# EAGLE board lv1b-imu-1 (EAGLE 3.55)
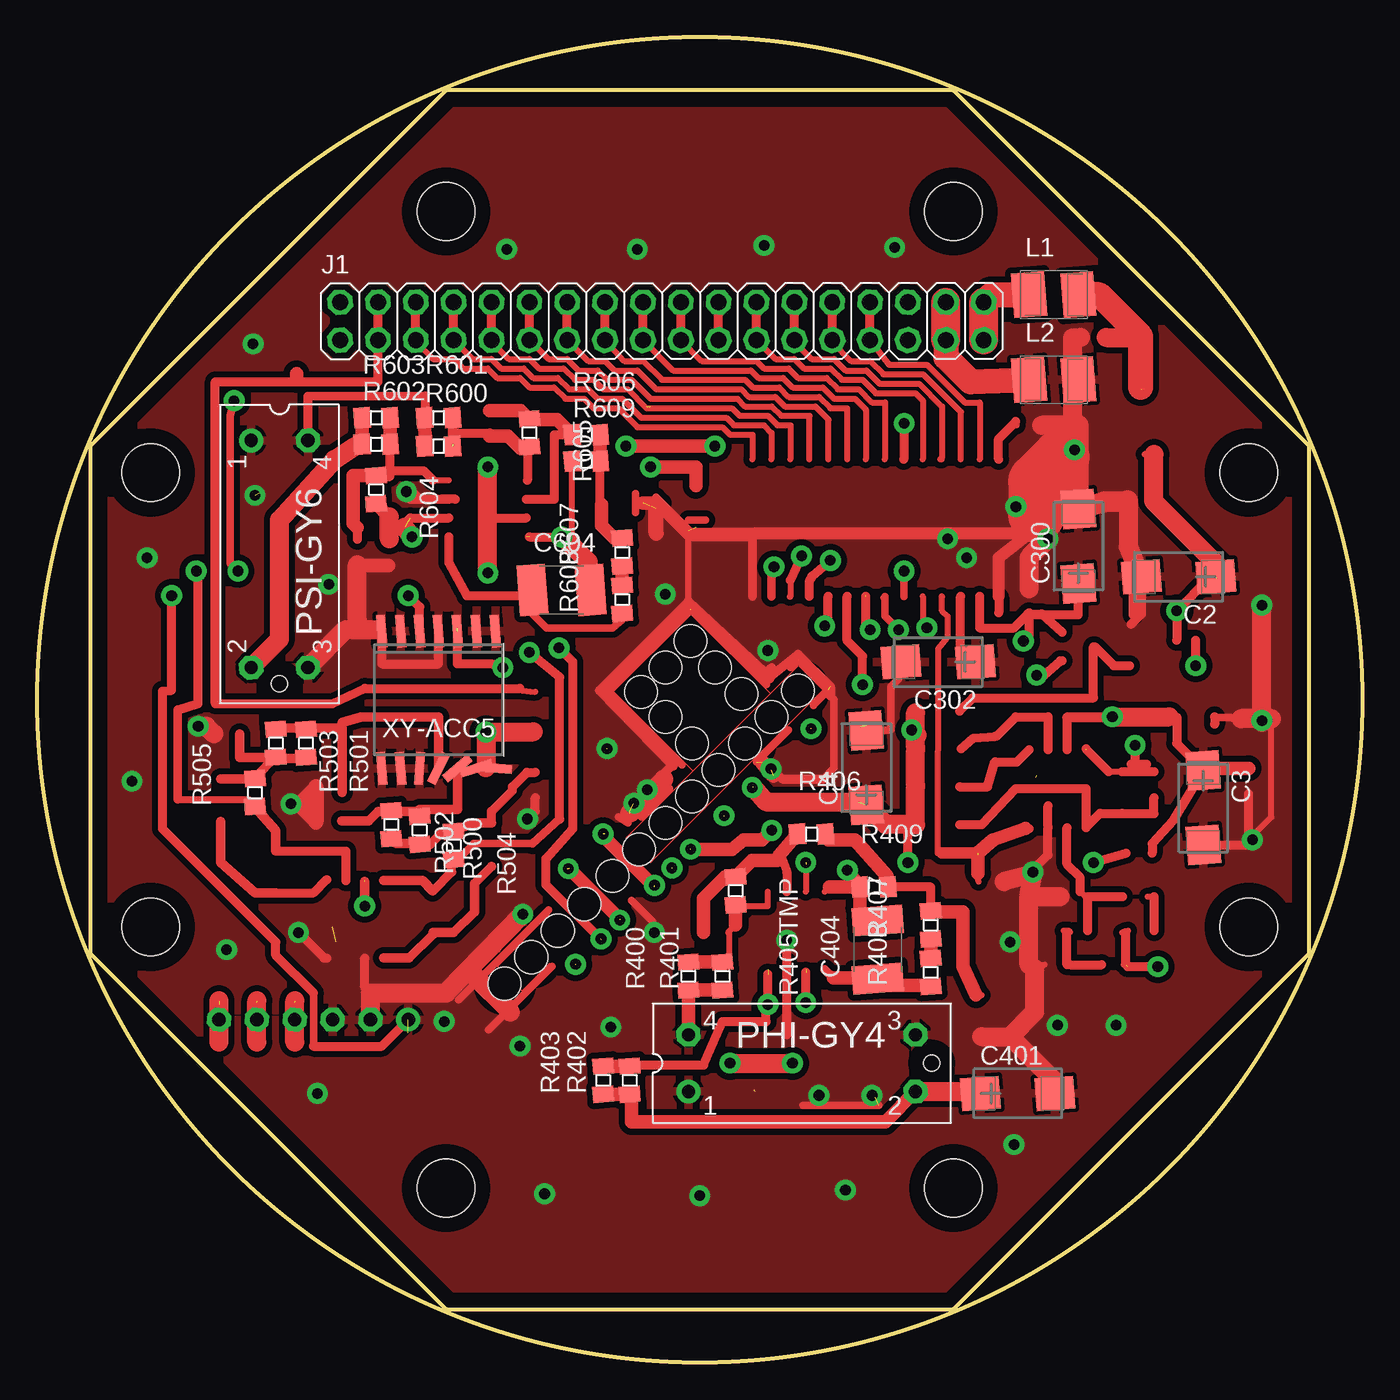
[diagram p0: board, top side]
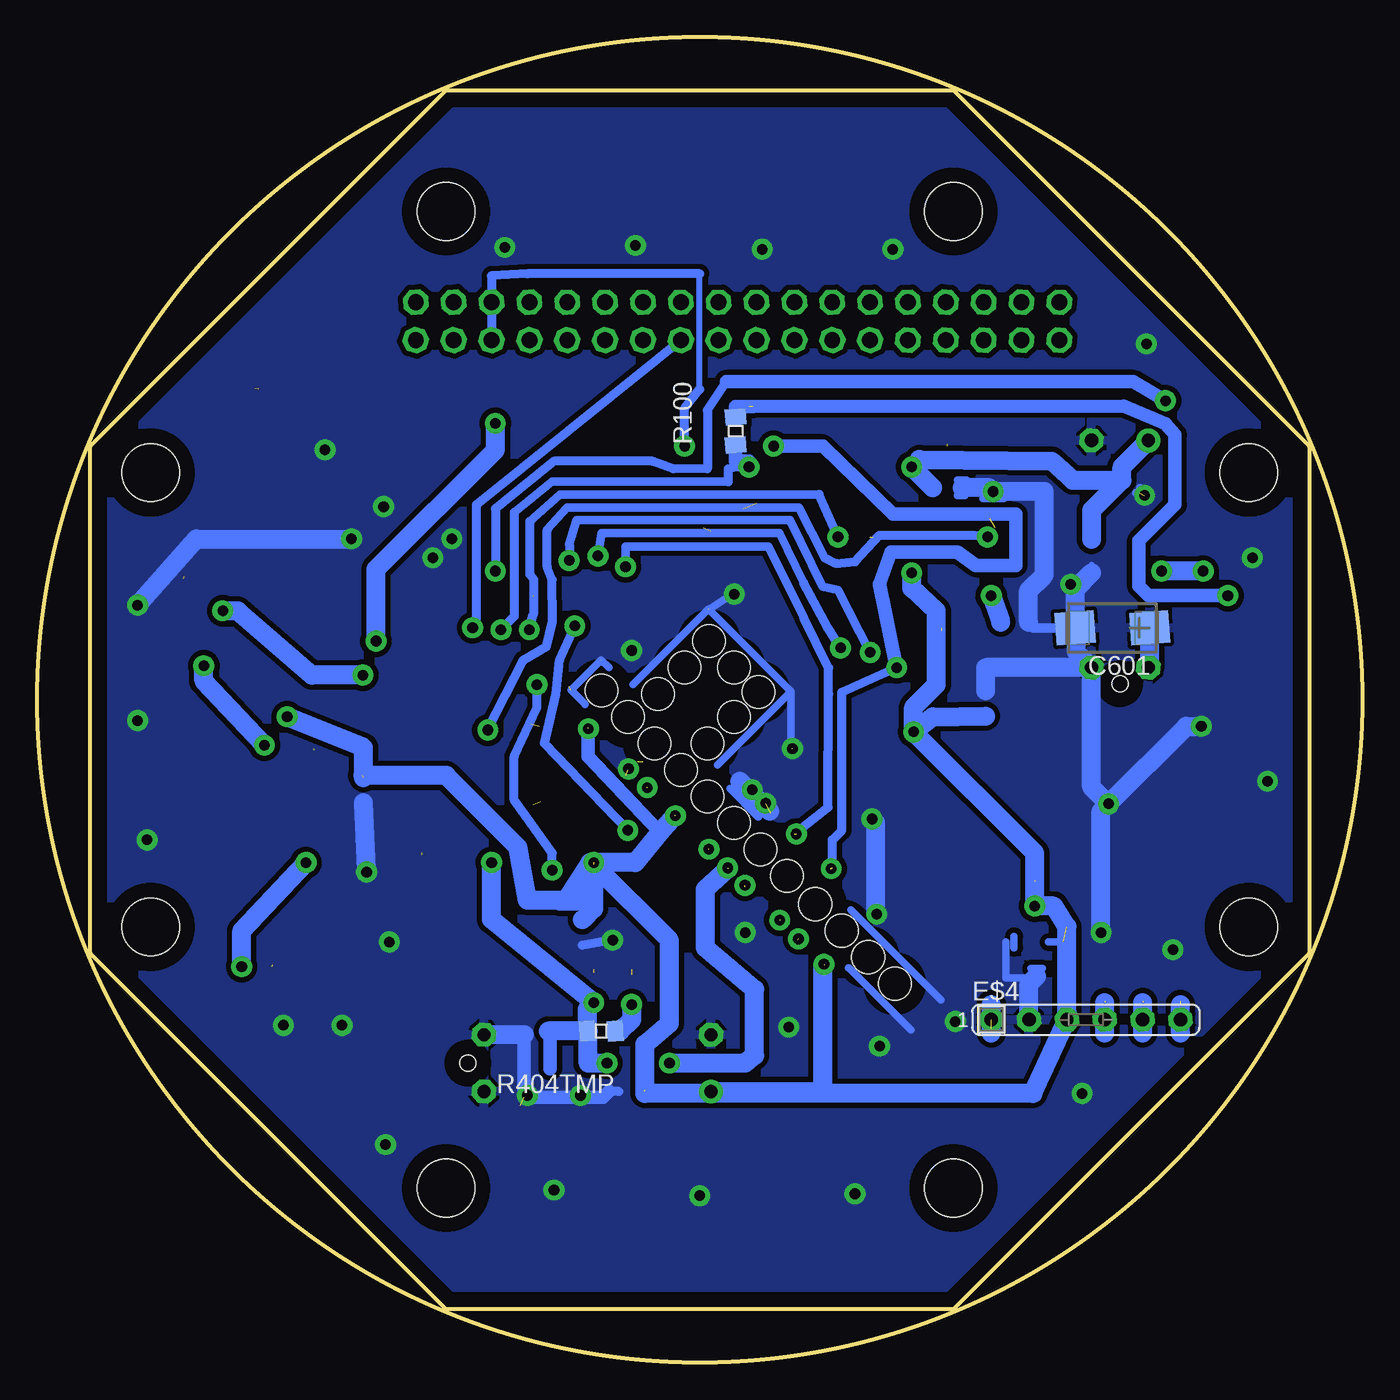
[diagram p1: board, bottom side, seen from below]

Size 88.9 x 88.9 mm. Coordinates in mm from the lower left corner, seen from the top.
Outline: 61.47,85.34 27.43,85.34 3.56,61.47 3.56,27.43 27.43,3.56 61.47,3.56 85.34,27.43 85.34,61.47 61.47,85.34
Outline: circle at 44.45,44.45 radius 44.45
Copper layers used: Top, Bottom
Holes 3.86 mm at 27.43,77.22 61.47,77.22 61.47,11.68 27.43,11.68 81.28,59.69 7.62,59.69 7.62,29.21 81.28,29.21
Holes 2.18 mm at 51.05,45.09 49.28,43.31 47.5,41.53 45.72,39.75 43.94,37.97 42.16,36.2 40.39,34.42 38.61,32.64 36.7,30.73 34.93,28.96 33.15,27.18 31.37,25.4 40.51,44.96 43.82,48.39 42.16,46.61 45.47,46.61 47.24,44.83 42.16,43.31 43.94,41.53
tKeepout: area 78.1,56.5 to 84.5,62.9; area 78.1,26 to 84.5,32.4; area 4.4,26 to 10.8,32.4; area 4.4,56.5 to 10.8,62.9; 2 lines
bRestrict: 12 lines

## Footprints (pad centres in the part's own frame; a part is rotated, then mirrored left to right if it is on the bottom)
6032 = smd 2.6 x 2.2 rotated 4.3:  -2.5,0 | smd 2.6 x 2.2 rotated 4.4:  2.5,0
812 = smd 1.9 x 3.4 rotated 4.3:  -1.95,0 | smd 1.9 x 3.4 rotated 4.4:  1.95,0
L-6 = drill 0.889 pad 1.6 round:  -6.35,0 | drill 0.889 pad 1.6 octagon:  -3.81,0;  -1.27,0;  1.27,0;  3.81,0;  6.35,0
18 = drill 1.067 pad 1.676 octagon:  -21.59,-1.27;  -21.59,1.27;  -19.05,-1.27;  -19.05,1.27;  -16.51,-1.27;  -16.51,1.27;  -13.97,-1.27;  -13.97,1.27;  -11.43,-1.27;  -11.43,1.27;  -8.89,-1.27;  -8.89,1.27;  -6.35,-1.27;  -6.35,1.27;  -3.81,-1.27;  -3.81,1.27;  -1.27,-1.27;  -1.27,1.27;  1.27,-1.27;  1.27,1.27;  3.81,-1.27;  3.81,1.27;  6.35,-1.27;  6.35,1.27;  8.89,-1.27;  8.89,1.27;  11.43,-1.27;  11.43,1.27;  13.97,-1.27;  13.97,1.27;  16.51,-1.27;  16.51,1.27;  19.05,-1.27;  19.05,1.27;  21.59,-1.27;  21.59,1.27
3FS = smd 2.2 x 3 rotated 4.3:  -1.65,0.01 | smd 2.2 x 3 rotated 4.4:  1.65,0
RO_CAN = drill 0.889 pad 1.6 round:  -8.89,-3.81 | drill 0.889 pad 1.6 octagon:  6.35,-3.81;  6.35,0;  -8.89,0 | hole 1.067: 7.429,-1.905
05 = smd 1.092 x 1.397 rotated 4.4:  0.94,0 | smd 1.092 x 1.397 rotated 4.3:  -0.94,0
14W = smd 0.6 x 2.2 rotated 4.4:  -2.54,-4.6 | smd 0.6 x 2.2 rotated 71.8:  -2.54,4.6 | smd 0.6 x 2.2 rotated 4.3:  -3.81,-4.6;  1.27,4.6 | smd 0.6 x 2.2 rotated 4.5:  -1.27,-4.6 | smd 0.6 x 2.2 rotated 4.6:  0,-4.6 | smd 0.6 x 2.2 rotated 94.3:  -3.81,4.6 | smd 0.6 x 2.2 rotated 49.3:  -1.27,4.6 | smd 0.6 x 2.2 rotated 26.8:  0,4.6 | smd 0.6 x 2.2 rotated 4.7:  2.54,-4.6;  1.27,-4.6 | smd 0.6 x 2.2 rotated 5:  2.54,4.6 | smd 0.6 x 2.2 rotated 4.8:  3.81,-4.6 | smd 0.6 x 2.2 rotated 4.9:  3.81,4.6

## Placement (x,y rotation side)
AA5  1013  [8]  21.34,29.72 0 top
AG4  1013  [8]  50.93,28.96 0 top
AG6  1013  [8]  30.23,57.28 270 top
C1  .1  [012]  74.04,57.79 0 top
C2  10  [6032]  76.58,52.71 180 top
C3  10  [6032]  78.23,37.21 270 top
C4  10  [6032]  55.63,39.88 90 top
C5  .1  [012]  67.01,38.38 270 bottom
C6  [012]  74.93,38.74 90 top
C7  22pF  [012]  64.26,41.15 90 top
C8  .1  [012]  70.87,68.76 0 top
C9  .1  [012]  81.28,38.99 90 top
C101  1  [206]  22.48,28.19 0 bottom
C102  .015  [210]  44.2,57.4 270 top
C200  .1  [012]  17.4,67.18 90 top
C300  10  [6032]  69.85,54.74 90 top
C301  .1  [012]  66.55,51.05 90 top
C302  10  [6032]  60.45,46.99 180 top
C303  .1  [012]  64.01,32.26 180 top
C304  101  [012]  66.55,62.87 0 top
C400  .1  [012]  49.02,18.16 180 bottom
C401  10  [6032]  65.79,18.03 0 top
C402  ?  [012]  55.37,19.69 180 bottom
C403  .022  [210]  63.37,23.24 90 top
C404  .056  [812]  56.39,27.69 90 top
C405  ?  [012]  45.59,28.83 0 top
C406  .1  [012]  52.32,28.83 270 bottom
C407  .1  [012]  55.37,21.97 180 bottom
C500  .1  [012]  25.27,44.2 270 bottom
C501  .1  [012]  23.24,49.66 0 bottom
C502  .001  [012]  19.56,36.32 180 top
C503  .001  [012]  19.56,38.61 180 top
C504  .0027  [012]  33.4,38.74 270 top
C505  .0027  [012]  12.7,42.16 180 top
C506  .015  [210]  26.54,30.23 90 top
C507  .015  [210]  16,32.89 90 top
C508  .1  [012]  20.83,25.91 180 bottom
C600  .1  [012]  18.16,54.36 270 bottom
C601  10  [6032]  16.76,49.28 180 bottom
C602  ?  [012]  21.46,54.36 270 top
C603  .022  [210]  39.24,57.66 180 top
C604  .056  [812]  35.18,51.82 0 top
C605  ?  [012]  30.35,62.99 270 top
C606  .1  [012]  27.69,58.67 0 bottom
C607  .1  [012]  23.62,54.36 270 top
D1  [B]  74.3,63.12 90 top
D3  [T23]  69.85,48.01 270 top
E$4  [L-6]  18.54,22.99 0 bottom
J1  [18]  41.91,69.85 0 top
J3  0 ohm  [206]  60.45,43.69 0 top
J4  0 ohm  [206]  73.28,48.13 90 top
L1  820uH  [3FS]  68.2,71.63 0 top
L2  820uH  [3FS]  68.2,65.91 0 top
MAX197  [28W]  56.24,55.98 180 top
PHI-GY4  [RO_CAN]  52.58,21.97 0 top
PSA  1013  [8]  68.45,38.48 0 top
PSI-GY6  [RO_CAN]  18.16,52.96 270 top
PSR  2951  [8]  78.36,45.85 0 top
R1  10k  [805]  73.91,34.16 0 top
R2  [206]  60.45,36.07 0 top
R3  [206]  72.77,38.23 90 top
R4  5.1k  [206]  60.45,38.61 0 top
R5  33  [206]  60.45,41.15 0 top
R6  10k  [805]  74.04,28.96 0 top
R7  100k  [805]  73.66,31.24 0 top
R8  0 OHM  [805]  72.26,26.67 0 top
R9  100k  [805]  69.47,31.24 180 top
R10  100k  [805]  68.45,26.67 0 top
R11  NP  [805]  69.72,28.96 0 top
R100  100k  [05]  42.04,62.48 90 bottom
R400  10k  [05]  43.69,25.91 90 top
R401  10k  [05]  45.97,25.91 90 top
R402  10k  [05]  39.75,18.92 90 top
R403  10k  [05]  37.97,18.92 90 top
R404TMP  100k  [05]  51.05,22.23 180 bottom
R405TMP  100k  [05]  46.86,31.62 270 top
R406  100k  [05]  51.94,35.43 0 top
R407  10k  [05]  59.94,29.34 90 top
R408  10k  [05]  59.94,26.16 90 top
R409  100k  [05]  56.13,31.88 0 top
R500  100k  [05]  25.65,35.69 270 top
R501  100k  [05]  18.03,41.53 270 top
R502  100k  [05]  23.75,36.07 270 top
R503  100k  [05]  16,41.53 270 top
R504  100k  [05]  27.94,34.67 270 top
R505  100k  [05]  14.61,38.23 90 top
R506  6.19k  [206]  30.48,34.8 90 top
R507  6.19k  [206]  12.32,37.72 270 top
R600  10k  [05]  26.92,61.47 0 top
R601  10k  [05]  26.92,63.37 0 top
R602  10k  [05]  22.73,61.6 0 top
R603  10k  [05]  22.73,63.37 0 top
R604  100k  [05]  22.73,58.55 270 top
R605  100k  [05]  33.02,62.36 270 top
R606  100k  [05]  36.83,62.23 0 top
R607  10k  [05]  39.24,54.36 90 top
R608  10k  [05]  39.24,51.18 90 top
R609  100k  [05]  36.83,60.45 0 top
RT200  10k @ 25C  [206]  33.4,43.56 90 top
XY-ACC5  ADXL202  [14W]  26.92,44.45 180 top

## Library data of the parts
AA5 AG4 AG6 C1 C5-C9 C101 C102 C200 C301 C303 C304 C400 C402 C403 C405-C407 C500-C508 C600 C602 C603 C605-C607 D1 D3 J3 J4 MAX197 PSA PSR R1-R11 R506 R507 RT200 XY-ACC5 = ipc-smd
C2-C4 C300 C302 C401 C404 C601 C604 = ipc-rcl
E$4 J1 L1 L2 PHI-GY4 PSI-GY6 = imu_anal
R100 R400-R403 R404TMP R405TMP R406-R409 R500-R505 R600-R609 = smd

## Nets
2.5V: C303. MAX197. PSA.
4.096V: C302. MAX197.
4A+: AG4. R402. R403. R404TMP.
4A-: AG4. C405. R400. R401. R405TMP.
4AO: AG4. C405. R405TMP. R406.
4B-: AG4. C404. R408.
4G0UT: PHI-GY4. R400. R401.
4GREF: C401. PHI-GY4. R402. R403.
5V: C300. C301. D3. MAX197.
5VREF: D3. J3. J4.
6A+: AG6. C602. R602. R603. R604.
6A-: AG6. C605. R600. R601. R605.
6AO: AG6. C605. R605. R606.
6B-: AG6. C604. R608.
6GOUT: PSI-GY6. R600. R601.
6GREF: C601. PSI-GY6. R602. R603.
6V: AA5. AG4. AG6. C3. C5. C9. C101. C400. C406. C500. C600. C606. E$4. PHI-GY4. PSA. PSI-GY6. PSR. R1. RT200. XY-ACC5.
6V-FBK: PSR.
+12: C1. C2. D1. D3. PSR.
/CS: J1. MAX197.
/HBEN: J1. MAX197.
/INT: J1. MAX197.
/RD: J1. MAX197.
/WR: J1. MAX197.
AX-: AA5. C506. R506.
AY-: AA5. C507. R507.
CLK: C304. MAX197.
CONN1: R6. R7.
CROSS1: R1. R6. R8.
CROSS2: R8. R10. R11.
D0: J1. MAX197.
D1: J1. MAX197.
D2: J1. MAX197.
D3: J1. MAX197.
D4: J1. MAX197.
D5: J1. MAX197.
D6: J1. MAX197.
D7: J1. MAX197.
FEEDBACK: C6. PSA. PSR. R3.
GND: AA5. AG4. AG6. C1. C2. C3. C4. C5. C8. C9. C101. C102. C200. C300. C301. C302. C303. C304. C400. C401. C402. C403. C406. C407. C500. C501. C502. C503. C504. C505. C508. C600. C601. C602. C603. C606. C607. E$4. J4. L2. MAX197. PHI-GY4. PSA. PSI-GY6. PSR. R9. R10. XY-ACC5.
PHIFILT: C403. R406. R407. R409.
PHIO: AG4. C404. MAX197. R409.
PSA-: C7. PSA. R4.
PSB-: C6. PSA. R2. R3.
PSIFILT: C603. R606. R607. R609.
PSIO: AG6. C604. MAX197. R609.
PXO: E$4. R100.
PXOF: C102. MAX197. R100.
QO: MAX197.
S$10: C501. XY-ACC5.
S$22: R607. R608.
S$32: R407. R408.
ST: J1. XY-ACC5.
T: C200. J1. RT200.
THO: MAX197.
VB+: J1. L1.
VB-: J1. L2.
VF+: C8. D1. L1.
VRDRV: C7. PSA. R5.
VREF: AG4. AG6. C4. C402. C407. C607. J3. R2. R4. R5. R404TMP. R604.
VTAP: PSA. R7. R9. R11.
XFITL: C502. R500. R502. XY-ACC5.
XO: AA5. C506. MAX197. R504.
XSUM: C504. R500. R502. R504. R506.
YFILT: C503. R501. R503. XY-ACC5.
YO: AA5. C507. MAX197. R505.
YSUM: C505. R501. R503. R505. R507.
ZO: MAX197.

## Tracks (layer width: path | path; a pad name or v marks a point on that pad's centre or on a via)
2.5V  (1 unrouted)
  Top 0.406: 60.71,34.16 60.43,34.16 60.45,47.88 61.06,48.62 61.09,48.64 61.09,50.04 60.71,50.42 60.71,51.36 60.68,51.38 | 66.55,35.81 66.55,35.88 | 63.16,32.26 63.12,32.81
  Top 0.61: 66.29,35.81 66.55,35.81
  Top 0.762: 60.71,34.16 63.12,34.16
  Top 0.914: 63.12,34.16 64.14,35.05 66.29,35.81 | 63.12,32.81 63.12,34.04
4.096V
  Top 0.406: 62.95,46.9 62.99,46.86 | 62.95,46.9 62.95,46.99 | 61.95,47.9 62.95,46.9
  Top 0.61: 61.95,47.9 61.95,51.38
4A+  (via drill 0.71 pad 1.4)  (1 unrouted)
  Top 0.406: 48.9,24 v49.02,24 | 39.75,19.86 39.75,19.94
  Top 0.61: v49.02,24 49.02,26.04 | 48.9,24 48.9,22.86 45.97,22.86 44.7,19.94 39.75,19.94
  Top 0.914: 37.97,19.86 39.75,19.86
  Bottom 0.406: v49.02,24 48.97,23.95
  Bottom 0.61: 49.78,22.23 R404TMP.
  Bottom 1.27: 49.78,22.23 49.02,22.99 v49.02,24
4A-
  Top 0.406: 46.86,30.68 46.86,30.61 49.02,30.61 49.02,31.56 | 46.86,29.34 46.36,28.83 46.44,28.83 46.44,27.27 45.97,26.8 45.97,26.85
  Top 0.914: 43.69,26.85 45.97,26.85 | 46.86,29.34 46.86,30.68
4AO
  Top 0.406: 49.78,34.01 49.86,34.09 | 46.15,32.56 R405TMP. | 44.74,28.83 44.7,28.83
  Top 0.61: 50.29,31.56 50.29,32.89 49.86,34.09 49.78,34.04
  Top 0.914: R405TMP. 47.96,33.66 49.66,33.66 49.78,34.01 | 46.15,32.56 44.7,31.12 44.7,28.83 | 49.78,34.04 R406.
4B-
  Top 0.406: 56.85,25.27 56.39,25.74 56.39,25.78
  Top 0.61: 59.94,25.27 R408. | 52.83,26.36 53.41,25.78
  Top 0.914: 56.85,25.27 59.94,25.27 | 53.41,25.78 56.39,25.78
4G0UT
  Top 0.406: R401. 45.97,24.89
  Top 0.914: R401. R400. PHI-GY4.
4GREF
  Top 0.406: R402. 39.88,17.98 39.88,18.03 | 63.16,18.16 63.29,18.03
  Top 0.914: R403. 39.88,17.98 39.88,16.13 56.9,16.13 58.93,18.16
  Top 1.27: 58.93,18.16 63.16,18.16
5V  (via drill 0.71 pad 1.4)
  Top 0.406: 68.75,48.98 68.75,48.96 | 66.55,50.2 66.55,50.17
  Top 0.61: 66.55,50.2 66.46,50.2 65.53,49.28 63.22,49.28 63.22,51.38 | 66.55,50.2 67.4,50.2 68.75,48.98 | 69.85,52.24 69.85,50.17 66.55,50.17 | 58.14,60.58 58.14,62.97 v58.17,62.99 | v66.17,48.39 66.55,48.77 66.55,50.2 | 66.55,50.2 66.55,50.29
  Bottom 1.27: v58.17,62.99 58.17,61.21 66.17,53.21 v66.17,48.39
5VREF
  Top 0.406: 70.87,48.01 70.95,48.01 | 73.28,46.74 73.28,46.71
  Top 0.61: 61.87,43.69 62.76,44.58 70.87,44.58 70.87,48.01 | 70.95,48.01 72.22,46.74 73.28,46.74
6A+
  Top 0.406: 23.67,61.6 23.67,61.67 | 23.67,63.3 23.67,63.37 | 22.86,59.44 22.73,59.44 R604. 22.81,59.49 22.86,59.44 | 26.54,59.18 27.63,59.18 | 22.86,59.44 23.24,59.82
  Top 0.61: 23.67,61.6 23.67,59.44 22.86,59.44 | 21.46,56.01 21.46,55.21 | 26.54,59.18 25.91,59.82 23.24,59.82
  Top 0.914: 23.67,61.67 23.67,63.3 | R604. 21.21,59.49 21.21,56.26 21.46,56.01
6A-  (1 unrouted)
  Top 0.406: 32.89,59.18 32.83,59.18 | 32.89,61.29 33.02,61.42 33.02,61.34 32.39,61.34 | 30.35,62.36 30.35,62.14 | 27.86,61.6 28.19,62.36
  Top 0.61: 27.86,61.6 27.86,63.37 | 32.89,61.29 32.89,59.18 | 28.19,62.36 30.35,62.36
  Top 0.914: 30.35,62.14 31.58,62.14 32.39,61.34
6AO
  Top 0.406: 33.07,63.25 R605. 33.02,63.25
  Top 0.61: 32.83,57.91 34.7,57.91 34.7,62.23 R606.
  Top 0.914: R606. 34.87,63.25 33.07,63.25 | 30.35,63.84 32.42,63.84 33.02,63.25
6B-
  Top 0.406: 33.23,50.21 33.23,51.82 32.85,51.44
  Top 0.508: 33.23,50.21 34.16,49.28 38.61,49.28 39.24,49.78 R608.
  Top 0.61: 27.63,55.37 27.63,53.65 28.83,51.44 32.85,51.44
6GOUT
  Top 0.406: 26.01,61.57 R600.
  Top 0.61: PSI-GY6. 18.16,64.82 26.04,64.85 26.01,61.57
  Top 0.914: 26.01,61.57 R601.
6GREF
  Top 0.406: 21.79,61.47 R602.
  Top 0.61: 21.34,61.47 21.79,61.47
  Top 0.914: 21.79,61.47 R603.
  Top 1.27: 21.34,61.47 19.94,60.58 16.26,56.52 16.26,48.51 14.35,46.61
  Bottom 0.406: 14.35,46.61 14.26,46.7
  Bottom 1.27: 14.26,46.7 14.26,49.28
6V  (via drill 0.71 pad 1.4)  (8 unrouted)
  Top 0.406: 74.8,34.16 74.76,34.16 | 78.23,39.75 78.23,39.71 | 30.86,39.88 30.73,39.88 30.73,39.85 | 29.46,39.85 29.46,39.88 30.1,39.88 | v51.56,33.53 51.56,31.56
  Top 0.61: 74.8,34.16 74.8,34.8 76.2,36.32 78.23,39.71 78.36,39.71 | 78.36,39.71 78.36,39.62 | 78.36,39.71 78.36,39.84 | 78.23,39.75 76.45,41.53 76.45,43.25 | 69.09,41.08 69.09,43.25 69.15,43.31 v72.14,43.31 | 30.23,56.64 32.83,56.64
  Top 0.635: 69.09,43.25 76.45,43.25 | 29.46,39.88 30.73,39.88 | 33.4,42.14 33.4,42.16 33.27,42.29 | v21.97,30.61 21.97,32.26
  Top 0.914: 78.36,39.84 81.28,39.84
  Top 1.27: v30.23,60.07 30.23,56.64 v30.23,52.96 | 30.1,39.88 v30.1,42.29 33.27,42.29 | v72.14,43.31 75.95,43.31
  Bottom 0.406: v30.23,60.07 29.72,60.58 | 43.56,18.03 43.69,18.16
  Bottom 0.508: 21.06,28.19 20.07,28.19
  Bottom 0.61: 28.83,58.67 28.54,58.67 | v51.56,33.53 51.82,33.53 | 36.2,26.54 36.07,26.67 | 48.13,18.03 48.13,18.29 | 19.81,22.99 19.81,23.5
  Bottom 0.914: 51.94,42.55 51.94,40.64 47.12,35.56
  Bottom 1.27: 18.16,55.21 18.16,57.15 16.13,59.18 | 14.35,61.85 16.13,60.07 16.13,59.18 | 16.13,59.18 19.43,59.18 20.83,60.45 29.72,60.58 | v72.14,43.31 67.02,41.24 67,39.23 | v30.23,60.07 28.83,58.67 | 67.06,39.37 61.47,39.37 56.64,34.54 56.01,30.99 53.47,30.99 51.82,33.53 | v30.23,52.96 30.23,51.94 28.58,50.42 28.58,45.47 30.1,43.94 v30.1,42.29 | 46.1,36.7 47.12,35.56 48.77,33.53 v51.56,33.53 51.56,30.44 52.32,29.68 | 25.27,43.35 28.83,43.31 v30.1,42.29 | v30.1,42.29 21.97,34.16 v21.97,30.61 20.7,30.61 19.81,29.21 19.81,23.5 | 51.56,33.4 46.48,28.32 46.48,22.73 48.13,21.34 48.13,18.29 | 36.2,26.54 36.2,18.16 43.69,18.16 | 48.13,18.03 43.56,18.03 22.1,18.03 19.81,22.99
  other vias: 51.92,42.51 46.09,36.67 36.12,26.7
+12  (via drill 0.71 pad 1.4)  (1 unrouted)
  Top 0.406: 74.93,60.92 74.3,60.92 | 74.89,57.79 74.93,57.79 | 79.12,52.58 79.12,53.56 | 68.75,47.06 68.68,46.99
  Top 0.61: 79.12,52.58 78.61,52.58 v76.45,50.42 76.45,48.45 | 68.75,47.06 68.65,47.06 67.56,46.1 v67.06,46.1
  Top 1.27: 74.93,57.79 74.93,60.92 | 79.12,53.56 74.89,57.79
  Bottom 0.61: v67.06,46.1 67.18,46.1
  Bottom 1.27: v76.45,50.42 75.44,50.42 70.49,46.1 67.18,46.1
/CS
  Top 0.406: 63.22,60.58 63.24,60.58 63.25,60.58 63.25,64.39 62.23,64.39 59.69,66.93 57.15,66.93 55.88,68.58
  Top 0.61: 55.88,68.58 55.88,71.12
/HBEN
  Top 0.406: 59.41,60.58 59.41,64.49 59.44,64.52 58.93,65.02 56.26,65.02 55.37,65.91 53.98,65.91 53.21,66.68 51.44,66.68 50.8,67.31 49.53,67.31 48.26,68.58
  Top 0.61: 48.26,68.58 48.26,71.12
/INT  (via drill 0.71 pad 1.4)
  Top 0.406: 45.72,68.58 45.72,68.45 | 59.41,51.38 59.41,49.43 v59.69,49.28
  Top 0.61: 45.72,68.58 45.72,71.12
  Bottom 0.406: 45.72,68.58 45.72,68.45 | v59.69,49.28 59.44,49.91
  Bottom 0.61: 59.44,49.91 59.44,57.53 45.72,68.58
/RD
  Top 0.406: 60.58,60.58 | 60.58,60.58 60.68,60.58 | 60.58,60.58 60.71,60.71 60.71,64.14 59.18,65.66 56.52,65.66 55.63,66.55 54.23,66.55 53.47,67.31 51.94,67.31 50.8,68.45 50.8,68.58
  Top 0.61: 50.8,68.58 50.8,71.12
/WR
  Top 0.406: 53.34,68.58 53.34,68.45 54.61,67.18 55.88,67.18 56.77,66.29 59.44,66.29 61.98,63.75 61.95,63.73 61.95,60.58
  Top 0.61: 53.34,68.58 53.34,71.12
AX-
  Top 0.406: 26.54,28.7 26.54,28.83 | 30.48,33.27 30.48,33.38
  Top 0.635: 23.24,27.12 24.96,27.12 26.54,28.7 | 26.54,28.83 27.94,28.83 29.34,30.23 29.34,32.13 30.48,33.27
AY-
  Top 0.406: 16,31.49 16,31.37 15.88,31.5 | 19.43,32.39 19.43,32.32
  Top 0.61: 16,31.49 18.54,31.49 19.43,32.39
  Top 0.635: 12.32,36.3 12.32,33.53 14.61,31.5 15.88,31.5
CLK
  Top 0.406: 65.66,63.12 65.7,62.87
  Top 0.61: 64.49,60.58 64.49,61.95 65.66,63.12
CONN1
  Top 0.406: 74.93,28.96 74.89,28.96 | 74.51,31.24 74.93,31.24
  Top 0.61: 74.93,31.24 74.93,28.96
CROSS1  (via drill 0.71 pad 1.4)  (1 unrouted)
  Top 0.406: 72.9,26.67 73.11,26.67 73.03,26.76 | 72.81,28.83 72.77,28.83 | 72.81,28.83 73.19,28.96 | 73.03,28.83 72.81,28.83
  Top 0.61: 73.03,26.76 73.03,28.83 | v70.87,33.53 73.06,34.16 | 73.15,26.54 v75.18,26.54
  Bottom 1.27: v70.87,33.53 75.18,28.96 v75.18,26.54
CROSS2
  Top 0.406: 69.22,26.67 69.3,26.67 69.09,26.67 | 68.87,28.96 69.22,28.96 69.3,28.87 69.09,28.87
  Top 0.61: 69.3,26.67 71.41,26.67 | 69.09,26.67 69.09,28.87
D0
  Top 0.406: 25.4,68.58 25.4,68.45 26.54,67.31 27.94,67.31 28.58,66.68 30.23,66.68 30.86,66.04 32.39,66.04 33.02,65.41 34.67,65.41 35.43,64.64 36.7,64.64 37.34,64.01 38.99,64.01 40.26,62.74 45.97,62.74 46.48,62.23 48.01,62.23 47.98,62.21 47.98,60.58
  Top 0.61: 25.4,68.58 25.4,71.12
D1
  Top 0.406: 49.25,60.58 49.25,62.33 49.28,62.36 48.77,62.87 46.74,62.87 46.23,63.37 40.51,63.37 39.24,64.64 37.59,64.64 36.96,65.28 35.69,65.28 34.93,66.04 33.27,66.04 32.64,66.68 31.12,66.68 30.48,67.31 29.21,67.31 27.94,68.58
  Top 0.61: 27.94,68.58 27.94,71.12
D2
  Top 0.406: 30.48,68.58 30.48,68.45 31.62,67.31 33.02,67.31 33.66,66.68 35.31,66.68 36.07,65.91 37.34,65.91 37.97,65.28 39.62,65.28 40.89,64.01 46.61,64.01 47.12,63.5 49.02,63.5 49.66,62.87 50.55,62.87 50.52,62.84 50.52,60.58
  Top 0.61: 30.48,68.58 30.48,71.12
D3
  Top 0.406: 51.79,60.58 51.79,63.48 51.82,63.5 49.91,63.5 49.28,64.14 47.5,64.14 46.99,64.64 41.15,64.64 39.88,65.91 38.23,65.91 37.59,66.55 36.32,66.55 35.56,67.31 34.29,67.31 33.02,68.58
  Top 0.61: 33.02,68.58 33.02,71.12
D4
  Top 0.406: 53.06,60.58 53.06,63.22 53.09,63.25 52.2,64.14 50.17,64.14 49.53,64.77 47.75,64.77 47.24,65.28 41.53,65.28 40.26,66.55 38.74,66.55 38.1,67.18 36.96,67.18 35.56,68.58
  Top 0.61: 35.56,68.58 35.56,71.12
D5
  Top 0.406: 54.33,60.58 54.33,63.98 54.36,64.01 53.21,64.01 52.45,64.77 50.42,64.77 49.78,65.41 48.01,65.41 47.5,65.91 41.91,65.91 40.64,67.18 39.37,67.18 38.1,68.58
  Top 0.61: 38.1,68.58 38.1,71.12
D6
  Top 0.406: 55.6,60.58 55.6,63.86 55.63,63.88 54.86,64.64 53.47,64.64 52.71,65.41 50.67,65.41 50.04,66.04 48.39,66.04 47.88,66.55 42.67,66.55 40.64,68.58
  Top 0.61: 40.64,68.58 40.64,71.12
D7
  Top 0.406: 56.87,60.58 56.87,64.36 56.9,64.39 56.01,64.39 55.12,65.28 53.72,65.28 52.96,66.04 51.05,66.04 50.42,66.68 48.77,66.68 48.26,67.18 44.58,67.18 43.18,68.58
  Top 0.61: 43.18,68.58 43.18,71.12
DAUGHTER
  Top 0: 49.18,44.87 43.87,50.18 38.68,44.99 43.99,39.68 | 43.99,39.68 51.08,46.76 | 39.5,35.18 43.99,39.68
FEEDBACK  (via drill 0.71 pad 1.4)  (1 unrouted)
  Top 0.406: 74.93,39.62 74.93,39.59 | 72.77,39.65 72.77,39.62 71.88,39.62
  Top 0.61: v77.72,46.74 77.72,48.45 | 73.66,39.62 v73.66,41.4 | 73.66,39.62 74.93,39.62 | 70.36,41.15 71.88,39.62 | 72.77,39.62 73.66,39.62
  Bottom 1.27: v77.72,46.74 77.72,45.72 v73.66,41.4
GND  (via drill 0.71 pad 1.4)  (14 unrouted)
  Top 0.406: 26.92,49.05 26.92,49.15 | 23.58,53.47 23.62,53.51 | 23.02,49.15 23.11,49.05 | 21.46,53.51 21.5,53.47 | 18.71,36.32 18.71,36.23 18.67,36.2 | 20.7,49.15 20.83,49.15 | 18.71,38.52 18.71,38.61 | 17.53,37.47 v17.02,37.47 17.65,37.47 | v50.29,28.32 50.29,26.36 | 43.69,51.05 43.69,55.75 | 66.42,32.89 66.68,32.89 v66.8,32.89 66.8,32.77 | 66.55,26.67 67.6,26.67 | 68.29,18.84 C401. | 63.37,21.84 | 73.28,49.56 73.38,49.56 73.41,49.53 | C2. 74.08,52.62 74.04,52.58 | 73.15,57.79 73.19,57.79 | 69.85,62.87 69.47,62.87 | C300. 67.61,55.54 66.68,55.63 | 48.13,55.63 48.09,55.54 47.98,55.54 | 57.79,46.86 C302. | 55.12,41.4 55.25,42.67 | 80.77,43.18 80.26,43.18 | 82.8,43.18 82.8,36.58 80.94,34.71 | 80.26,43.25 80.2,43.25 80.14,43.18 80.07,43.25
  Top 0.508: 34.29,30.35 34.29,30.33 28.28,24.32 | 28.28,24.32 | 34.54,26.54 34.52,26.54 30.29,22.31 | 51.38,17.25 56.46,17.25 | 39.88,30.99 41.28,29.59 41.28,28.96 v41.4,28.83 | 38.99,36.58 39.62,36.2 | 48.26,40.26 50.42,42.42 | 50.55,46.61 51.06,47.12 51.08,47.12 53.09,45.11 | 52.07,44.07 52.07,44.09 53.09,45.11 | 52.71,39.12 53.47,39.88 53.47,44.45 53.21,44.7 | 43.25,40.06 38.32,44.99 43.87,50.54 48.93,45.48 | 53.09,45.11 | 57.79,46.86 57.79,45.85 57.28,45.34 57.28,42.42 55.75,42.42 55.75,42.8 56.01,42.8 55.63,42.42 C4. | 78.99,43.25 80.07,43.25
  Top 0.584: 47.98,55.54 47.98,51.38
  Top 0.61: 21.97,27.12 21.97,25.15 22.35,24.77 21.97,23.37 22.35,22.99 | 25.65,57.91 27.63,57.91 | 25.65,57.91 25.15,58.42 v24.77,58.42 25.02,57.91 25.65,57.91 | 26.92,49.05 26.92,46.86 23.11,46.86 23.11,49.05 | 22.73,49.15 23.02,49.15 | 20.83,49.15 21.21,49.15 | 19.43,27.12 19.24,27.12 v17.53,28.83 | 33.4,37.89 33.4,36.96 v32.89,36.45 | 50.29,21.97 v50.29,28.32 | 49.28,39.75 50.04,39.12 52.71,39.12 | 53.21,44.7 53.21,45.34 51.05,47.5 49.15,45.97 | 49.28,46.61 49.15,46.48 49.15,45.97 | 49.15,45.97 49.15,45.85 | 43.69,51.05 49.15,45.97 | 67.82,35.88 67.82,34.04 66.68,32.89 | 66.93,26.42 66.55,26.67 | 73.41,49.53 74.08,50.21 C2. | 81.28,38.14 81.28,34.71 80.94,34.71 C3.
  Top 0.635: 43.69,51.05 37.72,45.09 42.67,40.01 42.55,40.01 40.01,37.47
  Top 0.813: 64.49,51.38 64.49,53.95 64.52,53.98 66.42,55.5 66.68,55.63 48.13,55.63
  Top 0.914: 21.5,53.47 23.58,53.47 | 20.83,49.15 21.46,49.78 | 47.98,55.54 43.77,55.54 41.66,57.66 40.64,57.66
  Top 1.016: 18.71,38.61 18.71,36.23 | 17.65,37.47 18.71,38.52 | 17.53,37.47 18.67,36.32 | 48.64,40.26 49.4,39.37 | 41.53,55.63 41.53,57.28
  Top 1.27: 32.64,30.1 27.43,24.77 22.35,24.77 22.35,22.99 | 21.46,49.78 21.46,53.51 | 21.21,49.15 22.73,49.15 | 11.85,42.16 11.34,42.67 v10.8,42.67 | 18.16,46.61 20.7,49.15 | 31.75,23.5 29.21,26.04 | 39.75,36.83 42.04,39.12 | 64.86,32.26 66.8,32.77 66.55,31.24 | 66.55,31.24 68.62,31.24 | 66.55,26.67 66.55,31.24 | 66.93,26.42 66.93,23.5 65.28,21.84 | 65.28,21.84 68.29,18.84 | 63.37,21.84 65.28,21.84 | 74.04,52.58 73.19,54.7 73.19,57.79 | 70.02,68.76 69.47,68.74 69.47,62.87 67.4,62.87 | 66.55,51.9 66.55,53.98 v67.82,55.25 | v82.17,50.8 82.17,42.93 82.8,43.18 80.77,43.18
  Top 1.422: 73.15,57.79 71.63,57.75 C300. 69.85,62.87
  Top 3.81: 67.06,56.9 67.06,59.06 68.71,60.71
  Bottom 0.406: 21.34,58.42 21.35,58.43 | 22.39,49.66 22.39,49.57 22.1,49.28 | 18.16,52.96 18.16,53.51 | 19.3,49.24 C601. 19.18,49.28 | 18.16,46.61 19.3,47.75 | 56.22,19.77 56.13,19.69 56.22,19.69 | v66.8,32.89 66.8,33.02
  Bottom 0.508: 23.9,28.19 23.9,25.78 22.35,25.78 | 28.28,24.32 34.29,30.35 | 28.28,24.32 | 34.47,26.47 34.45,26.47 30.29,22.31 | 15.19,58.34 15.19,58.32 14.94,58.32 14.94,58.7 | 52.15,44.15 52.15,44.17 53.09,45.11 | 50.55,46.61 51.08,47.12 53.09,45.11 | 53.09,45.11 | 48.93,45.48 43.87,50.54 38.32,44.99 | 38.32,44.99 43.25,40.06 | 38.32,44.99 38.32,41.15 38.23,41.15 | 43.82,50.5 42.04,51.69
  Bottom 0.61: 21.84,25.91 21.68,25.91 | v24.77,58.42 25.02,58.67 | 32.64,36.2 v32.89,36.45 | 32.64,30.1 32.64,29.97 | 49.87,18.16 50.55,18.16 | v50.29,28.32 52.32,27.98
  Bottom 0.635: C601. 22.1,49.28 | 19.3,47.75 19.3,49.24
  Bottom 0.914: 56.22,19.77 56.22,21.97 | 56.22,19.69 56.22,17.78 50.93,17.78 50.55,18.16
  Bottom 1.27: 21.84,25.91 22.35,25.4 22.35,22.99 | 25.02,58.67 26.84,58.67 | 21.35,58.43 v24.77,58.42 | 21.34,58.42 21.34,52.83 22.39,51.78 22.39,49.66 | 18.16,52.96 19.26,51.86 C601. | 19.18,49.28 19.18,47.63 18.16,46.61 | 25.27,45.05 25.27,46.61 18.16,46.61 | v10.8,42.67 11.81,42.67 v17.02,37.47 | 18.16,46.61 18.16,38.61 v17.02,37.47 | v17.02,37.47 17.53,36.96 v17.53,28.83 | 32.64,30.1 32.64,36.2 | 56.22,21.97 58.93,21.97 | 39.75,36.96 41.78,38.99 | 66.8,33.02 67,37.53 | v67.82,55.25 78.23,55.25 v82.17,50.8
  other vias: 38.48,22.48 32.58,30.06 52.45,17.91 14.61,58.17 56.01,17.91 40.03,37.51 40.93,38.41 49.23,39.81 62.36,53.98 61.09,55.25 42.14,51.54 38.23,41.17 34.04,11.3 44.45,11.18 54.23,11.56 18.8,18.03 12.7,27.69 6.35,38.99 7.37,53.98 14.48,68.33 19.56,52.2 31.5,74.68 40.26,74.68 48.77,74.93 57.53,74.8 69.6,61.21 65.66,57.4 82.17,43.05 81.53,35.05 68.45,22.61 65.28,28.19 65.53,14.61 27.31,22.86 32.39,21.21 49.02,47.75 72.39,22.61
  pour Top (isolate 0.406): 85.34,61.47 85.34,27.31 61.47,3.56 27.43,3.56 3.56,27.43 3.56,61.47 27.31,85.34 61.47,85.34
  pour Bottom (isolate 0.356): 27.43,85.34 61.47,85.34 85.34,61.47 85.34,27.43 61.47,3.56 27.43,3.56 3.56,27.43 3.56,61.47
PHIFILT
  Top 0.406: 63.37,24.64 62.99,24.64 | 60.07,30.23 60.02,30.28 59.94,30.28 | 57.15,32 57.07,31.93 57.07,31.88
  Top 0.61: 59.94,30.28 59.94,31.88 57.07,31.88 | 53.09,35.05 53.09,35.23 52.88,35.43
  Top 0.914: 62.99,24.64 62.1,26.54 62.1,30.23 60.07,30.23 | 57.15,32 57.02,32.64 54.86,35.05 53.09,35.05
PHIO  (via drill 0.71 pad 1.4)
  Top 0.406: 54.36,32.89 v54.36,33.02 | 53.15,31.88 52.83,31.56 | R409. 55.25,31.88 | 55.19,29.72 56.39,29.72 C404.
  Top 0.61: 54.33,51.38 54.33,48.41 55.37,47.37 v55.37,45.47
  Top 0.914: 55.25,31.88 54.36,32.89 | 53.15,31.88 R409. 55.19,29.72
  Bottom 0.61: v55.37,45.47 55.37,43.94 56.9,40.64 56.9,37.72 54.36,34.16 v54.36,33.02
PSA-
  Top 0.406: 64.26,40.3 64.26,40.26
  Top 0.61: 66.55,41.08 65.73,40.26 64.26,40.26 | 64.26,40.3 63.75,38.61 61.87,38.61
PSB-
  Top 0.406: 70.36,35.88 70.36,35.81 | 72.77,36.83 72.77,36.81
  Top 0.61: 61.87,36.07 63.37,36.07 65.66,38.48 70.36,38.48 70.36,35.88 71.31,36.83 72.77,36.83 | 72.77,36.81 74.93,36.81 74.93,37.89
PSIFILT
  Top 0.406: 38.68,55.3 39.24,55.3 | 37.85,57.53 37.84,57.53 37.84,57.66 37.85,57.66 37.77,57.73 | 37.77,60.45 37.85,60.45 37.77,60.53
  Top 0.61: 37.77,57.73 37.77,60.45
  Top 0.914: 38.68,55.3 37.85,56.13 37.85,57.53 | 37.77,60.53 37.77,62.23
PSIO  (via drill 0.71 pad 1.4)  (3 unrouted)
  Top 0.406: C604. 37.13,51.9 37.08,51.94 37.08,53.59 | 35.89,54.79 R609.
  Top 0.61: 33.02,55.37 v35.18,55.37 | 55.6,51.38 55.6,49.43 v55.88,49.15
  Top 0.914: 37.08,53.59 36.96,53.72 35.89,54.79
  Top 1.27: v35.18,55.37 35.31,55.37 36.96,53.72
  Bottom 0.559: 36.45,58.22 53.82,58.22 55.86,56.41
  Bottom 0.61: v35.18,55.37 36.45,58.22 | v55.88,49.15 55.63,50.17 | 55.86,56.41 55.86,52.88 55.6,52.5 55.6,51.44 | 55.6,51.38 55.6,50.29
PSUDOPHE
  Top 0.61: 26.92,48.39 26.92,49.28
PXO  (via drill 0.71 pad 1.4)  (2 unrouted)
  Top 0.508: 18.54,21.21 18.54,24.77
  Top 0.61: v9.02,51.44 9.02,45.09 8.41,45.03 8.41,35.79 16,28.19 16,27.31 18.54,24.77 | 24.89,22.99 23.11,21.21 18.54,21.21
  Bottom 0.914: 41.15,64.14 16,64.16 13.21,62.99 12.57,62.23 12.57,57.53 14.99,55.12 14.99,52.07 14.35,51.44 v9.02,51.44 | 42.04,63.42 42.04,64.14 40.89,64.14
  Bottom 1.27: 24.89,22.1 24.89,24
PXOF  (via drill 0.71 pad 1.4)
  Top 0.508: 56.87,51.38 56.87,50.06 v57.79,49.15
  Top 0.914: 44.2,58.8 44.2,60.07 v41.15,60.07
  Bottom 0.508: v41.15,60.07 42.55,59.94
  Bottom 0.559: 56.9,57.02 54.36,59.08 42.55,59.08
  Bottom 0.61: v57.79,49.15 56.9,50.04 56.9,57.02 | 42.55,59.94 42.55,59.08
  Bottom 0.914: R100. 42.04,60.45 41.15,60.45 v41.15,60.07
QO  (via drill 0.71 pad 1.4)  (1 unrouted)
  Top 0.61: 53.06,51.38 53.06,49.4 v52.83,49.4
  Top 0.914: v49.28,35.69 48.64,35.05 47.37,35.05 46.61,34.42 43.82,34.42
  Bottom 0.61: v52.83,49.4 53.85,47.12 54.1,44.83 54.86,41.53 v49.28,35.69
  other vias: 43.84,34.42
S$1
  Top 0.61: 78.99,43.31 78.99,42.8
S$2
  Bottom 0.406: 49.4,35.69 49.28,35.69
S$4
  Top 0: 51.08,46.76 52.73,45.11
S$5
  Bottom 0: 51.08,46.76
S$6
  Bottom 0: 52.73,45.11
S$7
  Bottom 0.508: 22.23,26.42 21.46,26.42
S$8
  Top 0.406: 56.77,51.31 56.8,51.31
S$9
  Top 0.61: 73.53,50.17 73.53,51.94
S$10  (via drill 0.71 pad 1.4)
  Top 0.61: 25.65,49.05 25.65,50.67 v24.89,51.44
  Bottom 0.406: 24.26,49.66 24.09,49.66
  Bottom 1.27: v24.89,51.44 24.26,49.66
S$12
  Top 0.61: 73.41,40.13 74.42,40.13
S$13
  Bottom 0.914: 53.85,30.73 52.71,30.73 52.07,31.37
S$14
  Top 0.61: 64.52,51.31 64.52,50.29
S$15
  Bottom 0.508: 23.37,27.81 23.37,28.58
S$16
  Top 0.61: 67.82,35.94 67.82,37.34
S$17
  Top 0.61: 50.29,25.65 50.29,26.8
S$18
  Top 0.61: 28.07,57.91 27.05,57.91
S$20
  Top 0.61: 23.11,48.13 23.11,49.02
S$21
  Top 0.508: 40.13,58.29 40.13,57.02
S$22
  Top 0.914: 39.24,52.12 R607.
S$23
  Top 0.508: 41.53,58.04 41.91,57.66
S$24
  Top 0.508: 43.69,56.52 44.83,56.52
S$25
  Bottom 0.508: 27.18,59.18 26.54,59.18
S$26
  Top 0.508: 40.53,36.58 42.42,38.48
S$27
  Bottom 0.508: 27.18,58.17 26.67,58.17
S$28
  Bottom 0.508: 24.05,57.96 25.45,57.96
S$29
  Bottom 0.508: 40.51,36.58 40.53,36.58 42.42,38.48
S$30
  Top 0: 41.15,33.53 52.73,45.11
S$31
  Top 0: 34.42,30.1 30.87,26.56 32.53,24.9 34.42,26.8
S$32
  Top 0.914: 59.94,27.1 R407.
ST  (via drill 0.71 pad 1.4)  (4 unrouted)
  Top 0.61: 28.19,49.28 28.19,46.86 30.48,46.86 v31.24,46.61
  Top 0.914: v39.5,61.47 v45.47,61.47 | 35.69,33.15 39.12,29.72
  Bottom 0.406: 44.45,65.28 44.45,73.03
  Bottom 0.61: 58.42,68.58 58.42,71.12 58.42,72.9 56.01,73.03 44.45,73.03 | 44.45,65.28 45.47,64.01 v45.47,61.47 | 35.56,33.15 35.56,35.05 34.93,35.69 34.93,44.96 v31.24,46.61
  Bottom 0.914: v39.5,61.47 36.2,61.47 31.5,56.9 23.24,56.9 23.24,53.47 25.91,53.47 27.18,54.36 31.62,54.36 32.39,52.2 v31.24,46.61
  other vias: 35.63,33.11 39.08,29.66
T
  Top 0.406: 32.39,45.21 32.51,45.09 33.4,44.98
  Top 0.508: 17.4,65.79 17.4,65.91
  Top 0.61: 22.86,71.12 22.86,68.58 22.86,65.79 17.4,65.79 11.94,65.79 11.94,44.2 19.81,44.2 21.97,45.21 32.39,45.21
  Top 0.914: 17.4,65.91 17.4,66.33
THO  (via drill 0.71 pad 1.4)  (1 unrouted)
  Top 0.406: 50.52,51.38 50.49,51.36 50.52,51.36 50.52,51.38 | 50.52,52.48 50.52,51.38
  Top 0.61: 34.14,32.03 34.14,33.78 35.94,35.81 35.94,46.99 v35,47.93 | v51.28,54.1 50.52,52.48 | 37.85,28.32 34.14,32.03 | 34.14,32.03 34.15,32.02
  Bottom 0.559: 37.49,52.3 39.09,55.63 51.05,55.63 v51.28,54.1
  Bottom 0.61: 37.49,52.3 35.87,49.25 v35,47.93
  other vias: 37.82,28.41
V1  (1 unrouted)
  Top 1.27: 17.27,21.46 17.27,24.26
  Bottom 1.27: 17.27,22.1 17.27,24.13
V2  (1 unrouted)
  Top 1.27: 14.73,21.46 14.73,24.26
  Bottom 1.27: 14.73,22.1 14.73,24.13
VB+
  Top 0.406: 63.5,68.58 63.5,68.45
  Top 1.676: J1. 64.01,71.63 66.55,71.64
  Top 1.93: 63.5,68.58 J1.
VB-
  Top 1.676: 60.96,68.58 60.96,67.44 62.61,65.79 66.55,65.92
  Top 1.93: 60.96,68.58 60.96,71.12
VEX  (1 unrouted)
  Top 1.27: 12.19,21.46 12.19,24.26
  Bottom 1.27: 12.19,22.1 12.19,24
VF+  (1 unrouted)
  Top 0.406: 74.04,65.28 74.04,65.41 74.02,68.74
  Top 1.27: 71.72,68.76 74.02,68.74
  Top 1.676: L1. 71.25,71.63 74.04,68.83 74.04,65.41
VRDRV
  Top 0.406: 64.26,42 64.35,42 | 61.87,41.15 61.98,41.15
  Top 0.61: 67.82,41.08 67.82,43.31 65.66,43.31 64.35,42 | 64.26,42 62.83,41.87 61.98,41.15
VREF  (via drill 0.71 pad 1.4)  (5 unrouted)
  Top 0.406: 23.62,55.21 23.62,55.25 | 58.93,43.59 59.03,43.69 | 58.93,41.25 59.03,41.15 58.93,41.05 | 59.03,38.61 58.93,38.71
  Top 0.61: 27.63,56.64 25.02,56.64 23.62,55.25 | 59.03,41.15 59.03,42.06 | 58.93,38.61 59.03,38.61 | 59.03,36.07 58.93,36.07 58.42,36.07 v58.42,33.53 | v51.56,24.13 51.56,26.16
  Top 0.914: 23.62,56.72 22.73,57.61
  Top 1.27: 23.62,55.25 23.62,56.72 | v25.15,55.37 24.64,56.01 | 59.03,42.06 v58.67,42.42 | 58.93,41.25 58.93,43.59 | 48.01,38.61 48.9,37.59 55.12,37.59 | 58.93,38.71 58.93,41.05 | 55.63,37.38 56.94,36.07 58.93,36.07 58.93,38.61 | v46.48,20.07 v50.67,20.07
  Bottom 0.406: 54.61,21.97 54.48,21.84 | 54.48,19.69 54.52,19.69
  Bottom 0.559: 36.07,53.98 37.8,57.35 53.34,57.35 54.71,55.86 54.69,55.83
  Bottom 0.61: v25.15,55.37 26.04,55.5 32.39,55.5 34.04,53.72 35.31,53.59 36.07,53.98 | 54.69,55.83 54.69,53.37 54.36,52.5 54.33,49.78 54.33,49.68 54.74,48.01 56.26,47.12 v58.67,42.42 | 54.52,21.97 54.61,21.97 54.61,22.23 | 51.99,23.7 v51.56,24.13 | 51.94,22.23 51.99,22.23
  Bottom 0.914: 54.48,21.84 54.48,19.69
  Bottom 1.27: v58.42,33.53 58.42,29.72 v51.56,24.13 | 54.61,22.23 51.99,22.23 51.99,23.7 | 51.94,22.23 51.94,20.07 v50.67,20.07 | 42.55,33.15 44.07,31.75 44.07,27.81 40.77,25.02 40.77,20.57 41.4,20.07 v46.48,20.07
  other vias: 47.97,38.55 42.58,33.17
VTAP
  Top 0.406: 69.98,31.58 70.32,31.24 70.49,31.24 | 70.57,28.96 70.49,28.96
  Top 0.61: 69.98,31.58 69.98,32.51 69.09,33.4 69.09,35.88 | 70.49,28.96 70.49,31.24 72.81,31.24
XFITL
  Top 0.406: R500. 25.65,37.08 25.65,36.96 | 23.75,36.96 R502.
  Top 0.635: 28.19,39.85 28.19,37.08 25.65,37.08 | 25.65,36.96 23.75,36.96 22.86,36.96 22.23,36.32 20.41,36.32
XO  (via drill 0.71 pad 1.4)
  Top 0.406: 26.54,31.63 | 27.81,33.6 27.94,33.73 28.27,33.73
  Top 0.508: 28.27,33.73 29.29,34.8 33.22,34.8
  Top 0.584: 33.22,34.8 35.05,36.45
  Top 0.61: 26.54,31.63 27.81,32.9 27.81,33.6 | 35.05,36.45 35.05,45.97 v33.02,47.63 | v53.21,53.8 51.97,52.73 51.79,52.38 51.79,51.38
  Top 0.635: 23.24,32.32 25.85,32.32 26.54,31.63
  Bottom 0.559: 36.22,52.05 38.41,56.49 52.71,56.49 53.21,54.86 53.19,54.86
  Bottom 0.584: v33.02,47.63 35.18,51.82 36.22,52.05
  Bottom 0.61: 53.19,54.86 v53.21,53.8
XSUM
  Top 0.406: 25.65,34.8 25.65,34.75 | 27.94,35.56 R504.
  Top 0.61: 33.4,39.59 32.85,39.59 31.88,38.61 31.88,38.35 30.48,36.96 30.48,36.2 30.48,36.22
  Top 0.635: 23.75,35.13 24.08,34.8 25.65,34.8 | 25.65,34.75 26.37,34.75 27.18,35.56 27.94,35.56 | R504. 29.13,36.12 29.46,36.2 30.48,36.2
YFILT
  Top 0.406: 20.45,38.23 20.41,38.61 | 20.45,42.55 20.45,42.93 | 18.03,42.55 R501. 18.11,42.55 | R503. 16.08,42.55
  Top 0.635: 26.92,39.85 26.92,43.31 21.72,43.31 20.45,42.93 | 20.45,38.23 20.45,42.55 18.11,42.55 | 16.08,42.55 18.03,42.55
YO  (via drill 0.71 pad 1.4)
  Top 0.406: R505. 14.61,37.21 | 16,34.29
  Top 0.508: R505. 14.17,37.72 9.42,37.74 | 10.8,52.96 v10.67,53.09 | v13.46,53.09 12.95,53.59 12.95,63.5 v13.21,64.52 | 58.14,51.38 58.14,51.54 58.17,51.56 v58.17,53.09
  Top 0.559: 9.42,37.74 9.42,43.76
  Top 0.61: 20.7,32.32 20.7,34.29 16,34.29 | 9.42,43.76 10.8,44.2 10.8,52.96
  Top 0.635: 14.61,37.21 16,35.69 16,34.29
  Bottom 0.559: 43.94,59.94 46.23,59.94
  Bottom 0.61: 42.67,65.79 43.94,63.88 43.94,59.94 | 46.23,59.94 47.63,60.45 54.23,60.45 58.17,57.28 v58.17,53.09
  Bottom 0.914: v13.21,64.52 15.37,65.79 42.67,65.79
  Bottom 1.27: v10.67,53.09 v13.46,53.09
YSUM
  Top 0.406: 16.08,40.51 16,40.59 16,40.64 | 17.96,40.51 18.03,40.59 | 14.58,39.14 14.61,39.12 14.61,39.17 14.61,39.24 | 13.59,42.16 13.55,42.16
  Top 0.635: 16.08,40.51 17.96,40.51 | 12.32,39.14 14.58,39.14 | 14.61,39.24 16,40.64 | 16,40.59 13.59,40.59 13.59,42.16
ZO  (via drill 0.71 pad 1.4)  (3 unrouted)
  Top 0.559: v49.43,53.37 49.43,53.24 49.25,53.06 49.25,51.38
  Top 0.61: 38.1,35.18 38.1,35.43
  Top 0.914: 41.4,31.88 38.1,35.18
  Bottom 0.559: 37.47,49.94 39.85,54.74 49.43,54.74 v49.43,53.37
  Bottom 0.61: 38.1,35.43 35.87,37.21 35.84,37.24 35.81,44.83 35.81,46.58 37.47,49.94
  other vias: 41.42,32 37.97,35.45

## Text on the board
Document: T | D0 | D1 | D2 | D3 | D4 | D5 | D6 | D7 | Int | HBEN | /RD | /WR | /CS | ST | Gnd | +12 | A+ | A- | (-) | AO | D0 | D1 | D2 | D3 | D4 | D5 | D6 | D7 | /SHDN | HBEN | /RD | /WR | /CS | Clk | B+ | (+) | B- | BO | RefAdj | AGnd | /Int | Ref | Vdd | DGnd | A0 | A1 | A2 | A3 | A4 | A5 | A6 | A7 | (-) | NC | T2 | (-) | ST | Vtp | NC | In | FBK | ~5V | Err | Out | Sen | SDN | Gnd | Yout | Xout | Yflt | Xflt | Vdd | Vdd | A- | AO | (+) | BO | NC | A+ | (-) | B+ | B- | A- | AO | (+) | BO | A- | AO | (+) | BO | A+ | (-) | B+ | B- | A+ | (-) | B+ | B-
bPinout: VEX | V2 | V1 | Vcc | Gnd | VOut